# Altium PCB PCB1.PcbDoc
Units mm, origin at the board's own origin, x right, y up, seen from the top; angles counter-clockwise.
Board outline 26 x 60 mm, 4 copper layers (L1, L2, L3, L4), stack 0.603 mm thick; 27 components, 42 nets, 181 pads, 46 vias.
Unrouted connection lines stored in the file: 7.
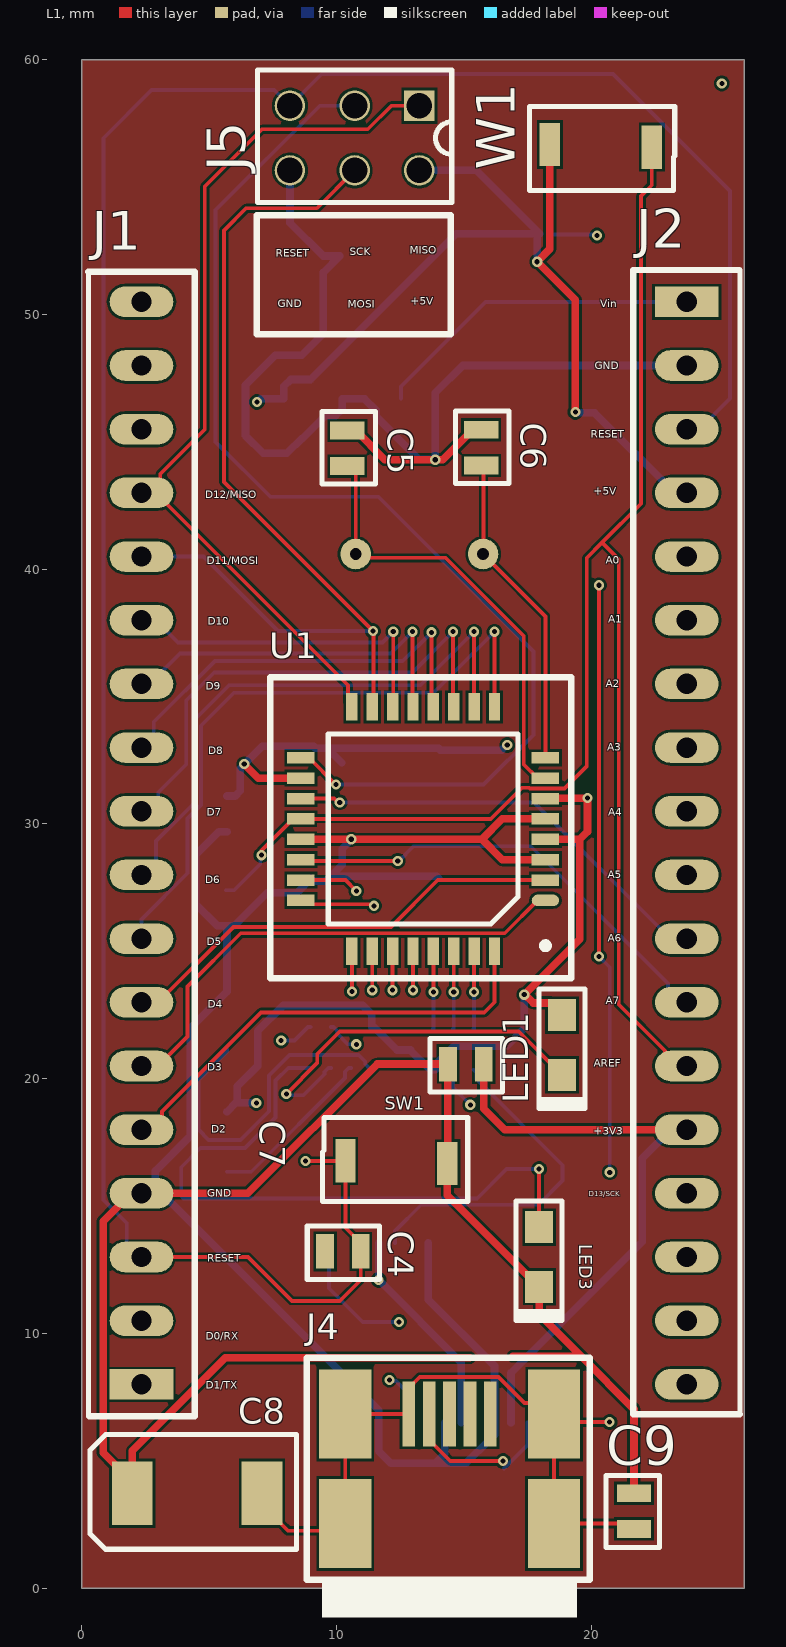
[diagram p0: L1 view]
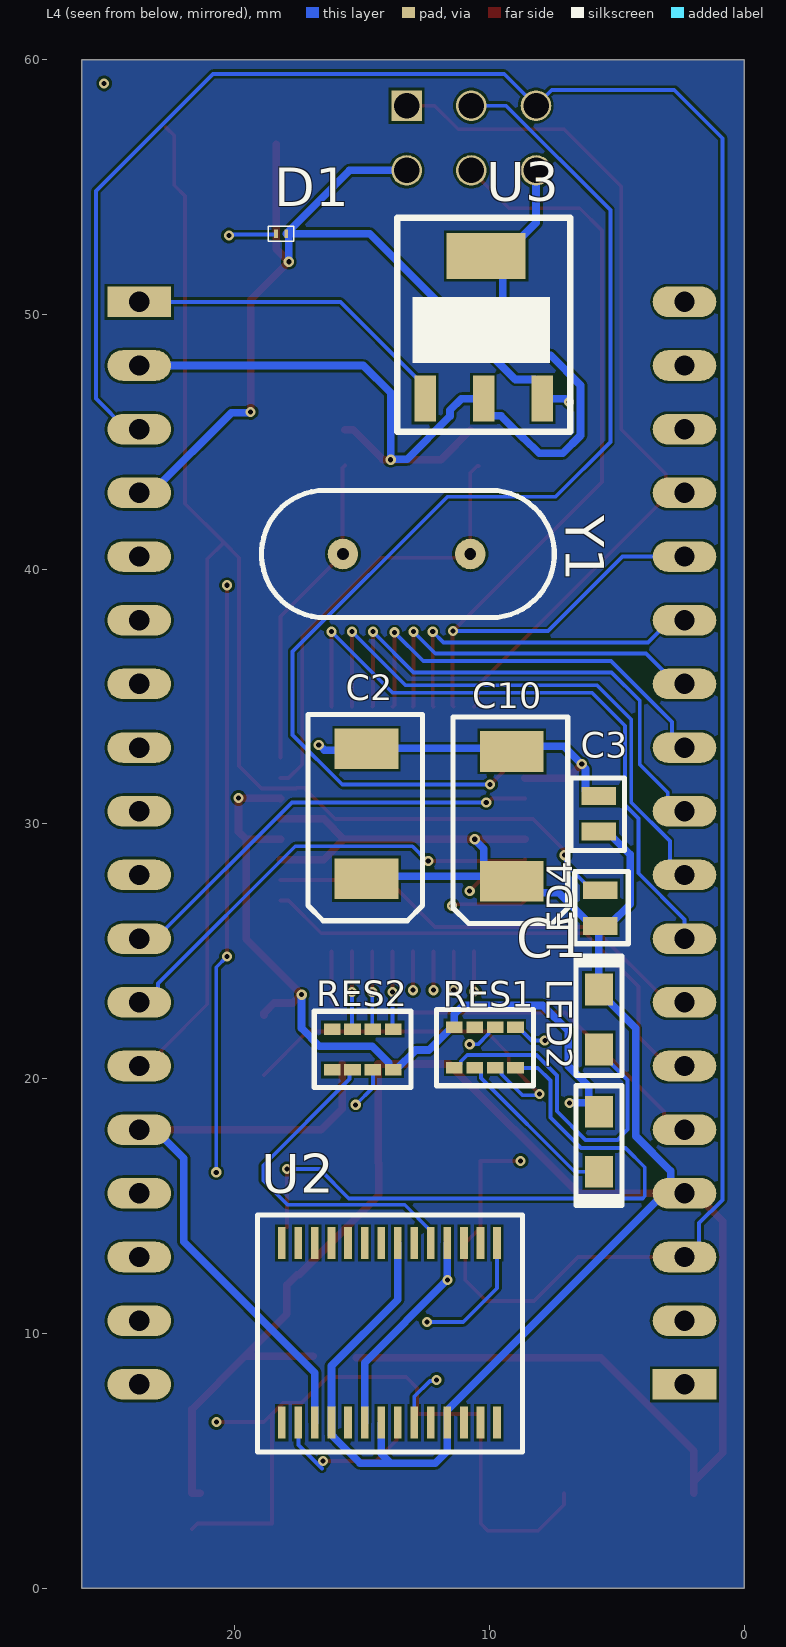
[diagram p1: L4 view, seen from below]
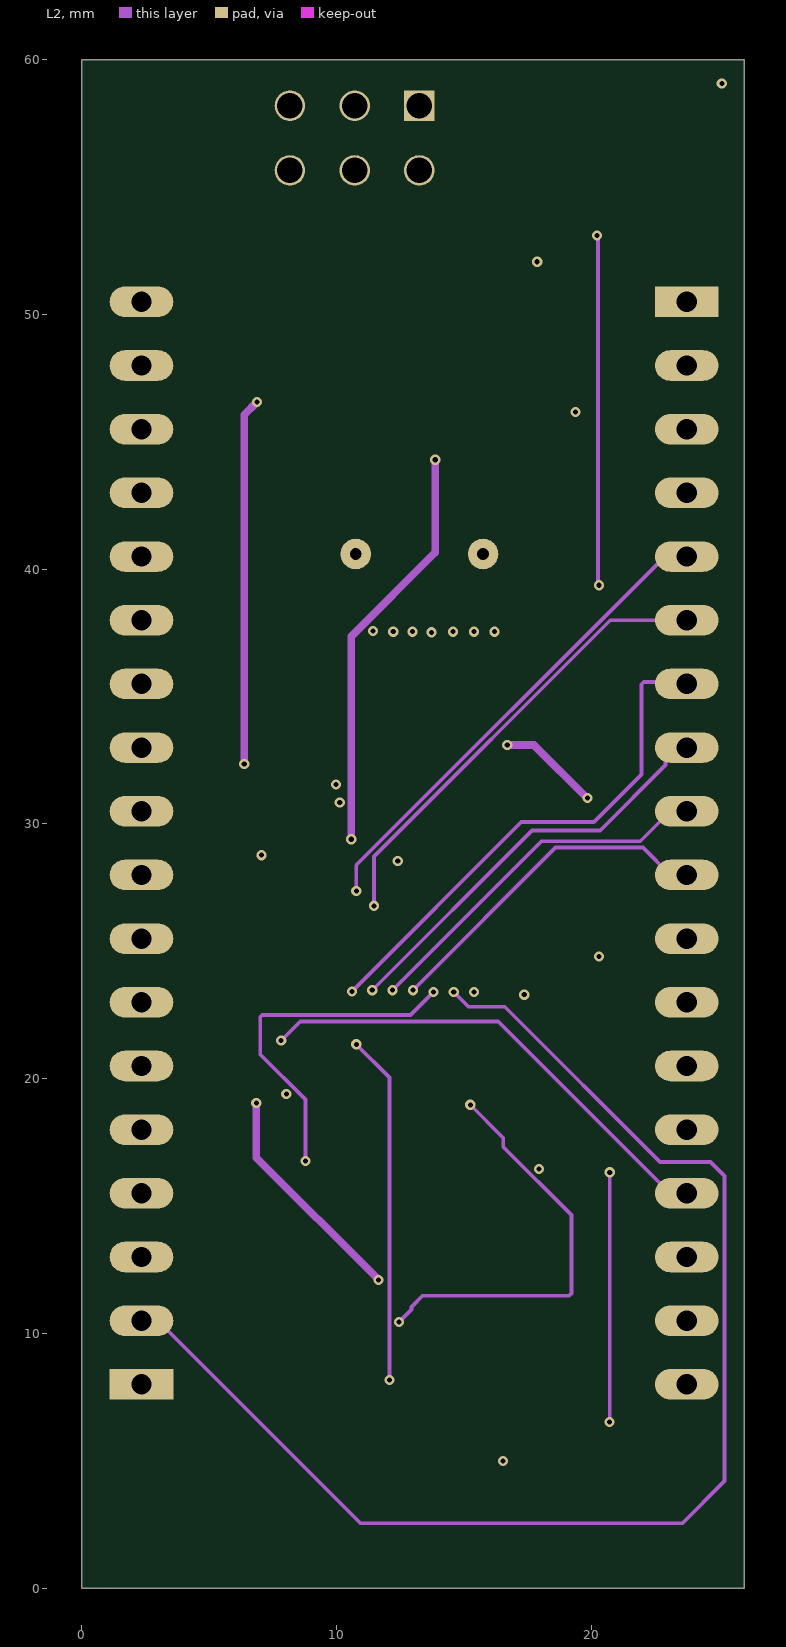
[diagram p2: L2]

## Layer stack, top to bottom
Top Solder: solder mask 0.0102, Solder Resist, Dk 3.5
L1: signal copper 0.035
Dielectric 2: prepreg 0.0711, PP-006, Dk 4.1
L2: signal copper 0.0356
Dielectric 1: dielectric 0.32, FR-4, Dk 4.8
L3: signal copper 0.0356
Dielectric 3: prepreg 0.0711, PP-006, Dk 4.1
L4: signal copper 0.035
Bottom Solder: solder mask 0.0102, Solder Resist, Dk 3.5

## Board outline
0,0 0,60 26,60 26,0

## Design rules (kind name [scope] priority, off if disabled: settings)
Clearance [All] p1: gap=0.1 ignorepadtopadclearanceinfootprint=FALSE
PolygonConnect [All] p1: connectstyle=Relief reliefconductorwidth=0.254 reliefentries=4 polygonreliefangle="90 Angle" airgapwidth=0.254
RoutingVias [All] p1: holewidth=0.2 width=0.4 viastyle="Through Hole" minholewidth=0.2 minwidth=0.4 maxholewidth=0.2 maxwidth=0.4
SolderMaskExpansion [All] p1: expansion=0.102 istentingtop=FALSE
Width "Schematic Width Constraint_2" [InNet('+3V3')] p1: maxlimit=0.3 minlimit=0.3 preferedwidth=0.3
Width "Schematic Width Constraint_1" [InNet('+5')] p2: maxlimit=0.3 minlimit=0.3 preferedwidth=0.3
Width "Schematic Width Constraint" [InNet('GND')] p3: maxlimit=0.3 minlimit=0.3 preferedwidth=0.3
Width [All] p4: maxlimit=0.5 minlimit=0.15 preferedwidth=0.15
30 further rules are at their usual default settings.

## Classes and differential pairs
component class Sheet2: D1 J1 J5 W1
component class Sheet1: C1 C2 C3 C4 C5 C6 C7 C8 C9 C10 LED1 LED2 LED4 RES1 RES2 SW1 U1 U2 Y1

## Components (designator, comment, footprint, x,y, rotation, side; value= is the part's Value field where it differs from the comment)
C1 "0.1uF" Capacitor0805 5.65,26.7 r270 bottom
C2 "4.7u" "tantalum cap 7343" 14.825,30.4 r270 bottom
C3 "0.1uF" Capacitor0805 5.7,30.4 r90 bottom
C4 "0.1uF" Capacitor0805 10.25,13.225 r180 top
C5 "18pF" Capacitor0805 10.425,44.75 r270 top
C6 "18pF" Capacitor0805 15.675,44.775 r270 top
C7 "0.1uF" Capacitor0805 15.075,20.575 r180 top
C8 "4.7uF" "tantalum cap 7343" 4.525,3.725 r180 top
C9 "4.7uF" Capacitor0805 21.675,3.025 r90 top
C10 "4.7uF" "tantalum cap 7343" 9.125,30.3 r270 bottom
D1 "MBR0520" "shotkey diode sod962" 18.175,53.175 r0 bottom
J1 "HEADER_18_NOS" DIP18 2.34,8 r180 top
J2 "HEADER_18_NOS" DIP18 23.75,50.5 r0 top
J4 "USB_B_MINI" "Mini B usb" 18.538,6.837 r90 top
J5 "HEADER_3X2_NOS" DIP6 13.25,58.2 r270 top
LED1 "RED_RX" "LED 0805" 18.85,21.325 r90 top
LED2 "GREEN_TX" "LED 0805" 5.7,17.525 r90 bottom
LED3 "L_AMBER" "LED 0805" 17.95,13 r90 top
LED4 "BLUE" "LED 0805" 5.7,22.325 r270 bottom
RES1 "Component_1" "Quad 4 res array" 8.975,22.125 r270 bottom
RES2 "Component_1" "Quad 4 res array" 13.775,22.05 r270 bottom
SW1 "RESET" switch 12.25,16.775 r0 top
U1 "atmega168 20au" Quad32 18.2,27 r180 top
U2 "FT232RL" "Quad28 FTDI" 9.7,13.55 r270 bottom
U3 "UA78M05" SOT223-4 10.225,46.7 r90 bottom
W1 "2XJP" switch 20.475,56.575 r180 top
Y1 "16MHz" "TH XT" 13.25,40.6 r180 bottom

## Footprints (in the part's own frame and the unit in brackets; to place one, negate y for a bottom-side part, rotate by r counter-clockwise, add the part's x,y. Pads: shape width x height; smd on the part's side, far side on the other; paste and mask are expansions set on the pad)
Capacitor0805 [mm]
  rect 0.7x1.35 on Mech16: 1(-0.7,0) 2(0.7,0)
  rect 0.7x1.35 smd: 1(-0.7,0) 2(0.7,0)
  silkscreen extent -1.44,-1 1.4,1.1, body extent -1.1,-0.7 1.1,0.75, height 0.89
DIP6 [mm]
  rect 1.2x1.2 hole 1: 1(0,0)
  round 1.2 hole 1: 2(0,-2.54) 3(0,-5.08) 4(2.54,-5.08) 5(2.54,-2.54) 6(2.54,0)
  silkscreen extent -1.4,-6.35 3.8,1.27, body extent -1.3,-6.31 3.78,1.31, height 8.39
DIP18 [mm]
  rect 2.5x1.2 hole 0.8: 1(0,0)
  oval 2.5x1.2 hole 0.8: 2(0,-2.5) 3(0,-5) 4(0,-7.5) 5(0,-10) 6(0,-12.5) 7(0,-15) 8(0,-17.5) 9(0,-20) 10(0,-22.5) 11(0,-25) 12(0,-27.5) 13(0,-30) 14(0,-32.5) 15(0,-35) 16(0,-37.5) 17(0,-40) 18(0,-42.5)
  silkscreen extent -2.1,-43.68 2.08,1.25
"LED 0805" [mm]
  rect 1.25x1.1 smd: 1(-1.175,0) 2(1.175,0)
  silkscreen extent -2.5,-0.9 2.2,0.9, body extent -1.03,-0.41 1.03,0.5, height 0.85
"Mini B usb" [mm]
  rect 3.5x2.05 smd: 1(-4.3,8.2) 1(-4.3,0) 1(0,8.2) 1(0,0)
  rect 2.55x0.5 smd: 1(0,5.7) 2(0,4.9) 3(0,4.1) 4(0,3.3) 5(0,2.5)
  silkscreen extent -8,-1.4 2.2,9.7, body extent -8,-0.85 1.2,9.05, height 3.86
"Quad28 FTDI" [mm]
  rect 1.25x0.3 smd: 1(0,0) 2(0,-0.65) 3(0,-1.3) 4(0,-1.95) 5(0,-2.6) 6(0,-3.25) 7(0,-3.9) 8(0,-4.55) 9(0,-5.2) 10(0,-5.85) 11(0,-6.5) 12(0,-7.15) 13(0,-7.8) 14(0,-8.45) 15(7.05,-8.45) 16(7.05,-7.8) 17(7.05,-7.15) 18(7.05,-6.5) 19(7.05,-5.85) 20(7.05,-5.2) 21(7.05,-4.55) 22(7.05,-3.9) 23(7.05,-3.25) 24(7.05,-2.6) 25(7.05,-1.95) 26(7.05,-1.3) 27(7.05,-0.65) 28(7.05,0)
  silkscreen extent -1.1,-9.4 8.2,1, body extent -0.3,-9.3 7.5,0.9, height 1.9
Quad32 [mm]
  oval 1.075x0.45 smd: 1(0,0)
  rect 1.075x0.45 smd: 2(0,-0.8) 3(0,-1.6) 4(0,-2.4) 5(0,-3.2) 6(0,-4) 7(0,-4.8) 8(0,-5.6) 17(9.6,-5.6) 18(9.6,-4.8) 19(9.6,-4) 20(9.6,-3.2) 21(9.6,-2.4) 22(9.6,-1.6) 23(9.6,-0.8) 24(9.6,0)
  rect 0.45x1.075 smd: 9(2,-7.6) 10(2.8,-7.6) 11(3.6,-7.6) 12(4.4,-7.6) 13(5.2,-7.6) 14(6,-7.6) 15(6.8,-7.6) 16(7.6,-7.6) 25(7.6,2) 26(6.8,2) 27(6,2) 28(5.2,2) 29(4.4,2) 30(3.6,2) 31(2.8,2) 32(2,2)
  silkscreen extent -1.02,-8.76 10.8,3.05, body extent 0.32,-7.3 9.33,1.71, height 1.15
"Quad 4 res array" [mm]
  rect 0.45x0.65 smd: 1(0.1,0) 2(0.1,-0.8) 3(0.1,-1.6) 4(0.1,-2.4) 5(1.7,-2.4) 6(1.7,-1.6) 7(1.7,-0.8) 8(1.7,0)
  silkscreen extent -0.6,-3.1 2.4,0.7, body extent 0.1,-2.8 1.7,0.4, height 0.51
"shotkey diode sod962" [mm]
  rect 0.15x0.32 smd: 1(-0.2,0) 2(0.2,0)
  silkscreen extent -0.5,-0.3 0.5,0.3, body extent -0.3,-0.15 0.3,0.15, height 0.33
SOT223-4 [mm]
  rect 1.8x0.84 smd: 1(0,2.3) 2(0,0) 3(0,-2.3)
  rect 1.8x3.1 smd: 4(5.6,-0.1)
  silkscreen extent -1.3,-3.4 7.1,3.4, body extent -0.7,-3.25 6.3,3.25, height 1.61
switch [mm]
  rect 0.8x1.7 smd: 1(-1.9,0) 2(2.1,-0.1)
  silkscreen extent -2.8,-1.6 2.9,1.7, body extent -2.4,-1.45 2.5,1.45, height 2.01
"tantalum cap 7343" [mm]
  rect 1.6x2.5 smd: 1(-2.55,0) 2(2.55,0)
  silkscreen extent -3.9,-2.3 4.2,2.2, body extent -3.57,-2.25 3.57,2.05, height 2.8
"TH XT" [mm]
  round 1.2 hole 0.457: 1(-2.5,0) 2(2.5,0)
  silkscreen extent -5.7,-2.5 5.8,2.5, body extent -5.75,-2.33 5.75,2.32, height 3.5

## Part data
C1 C2 C3 C4 C5 C6 C7 C8 C9 C10 D1 J1 J2 J4 J5 LED1 LED2 LED3 LED4 SW1 U2 U3 W1 Y1: library part Component_1

## Via types
v1: diameter 0.4, hole 0.2, L1 to L4, 46 vias

## Nets (pads, with @x,y where several pads share a name; then routed paths per layer and width w, separated by ;. In a path a pad name is that pad's centre, name@x,y a point inside that pad or via, vN(x,y) a via of type N, cw(c..) or ccw(c..) an arc to the next point about the centre after c; other vN are vias at no path point)
+3V3: C7.1@15.775,20.575 J2.14 U2.17 | length 24.8
  L1 w0.3: C7.1@15.775,20.575 15.775,18.825 16.6,18 J2.14
  L4 w0.3: U2.17 16.85,8.45 22,13.6 22,16.875 23.125,18 J2.14
+5: C2.1 C3.2@5.7,31.1 C10.1 D1.1 J2.4 J5.6 LED1.2 LED2.2 RES1.4 RES2.8 U1.4 U1.6 U1.18 U2.4 U2.20 U3.3 W1.2 | length 122
  L1 w0.3: v1(6.375,32.35) 6.925,31.8 U1.18 ; U1.4 19.55,29.4 ; U1.6 18.213,31.013 19.838,31.013 v1(19.85,31.025) ; W1.2 18.375,52.575 v1(17.875,52.075) 19.375,50.575 v1(19.375,46.175) ; LED1.2 18.85,22.575 18.45,22.975 17.722,22.975 17.397,23.3 v1(17.37,23.3) 19.55,25.48 19.55,29.4 ; v1@19.85,31 19.85,29.7 19.55,29.4
  L2 w0.3: v1(6.375,32.35) 6.375,46.068 v1(6.875,46.568) ; v1(6.85,19.05) 6.85,16.9 v1(11.65,12.1) ; v1(16.7,33.1) 17.75,33.1 19.825,31.025 v1(19.85,31.025)
  L4 w0.3: LED2.2 LED2.2@6.05,19.05 ; C3.2@5.7,31.1 6.025,31.1 6.225,31.3 6.225,32.173 6.375,32.323 v1(6.375,32.35) 7.075,33.05 9.1,33.05 9.175,32.975 C10.1@9.525,32.975 ; v1(6.85,19.05) LED2.2@6.05,19.05 ; v1(6.875,46.568) 6.902,46.568 7.034,46.7 U3.3 7.925,47.18 8.195,47.45 8.975,47.45 14.7,53.175 D1.1@17.91,53.175 ; C10.1@10.2,32.4 9.625,32.975 C10.1@9.525,32.975 ; U2.4 v1(11.65,12.1) 14.9,8.85 U2.20 ; J5.6 15.49,55.66 D1.1 D1.1@17.91,53.175 ; v1(16.7,33.1) 16.673,33.1 16.473,32.9 14.075,32.9 14,32.975 C10.1@9.525,32.975 ; v1(17.37,23.3) 17.375,23.295 17.375,21.975 16.675,21.275 14.596,21.275 13.95,20.629 13.95,20.425 13.875,20.35 RES2.8 13.675,20.35 12.9,21.125 12.375,21.125 11.475,22.025 RES1.4 11.375,22.524 11.024,22.875 7.9,22.875 6.9,21.875 6.9,20.5 6.1,19.7 6.1,19.1 LED2.2@6.05,19.05 ; v1(17.875,52.075) 17.875,53.075 17.9,53.1 17.9,53.165 D1.1@17.91,53.175 ; v1(19.375,46.175) 19.402,46.175 19.427,46.15 20.125,46.15 23.275,43 J2.4
A0: J2.5 U1.23 | length 22.2
  L1 w0.15: U1.23 10.35,27.8 v1(10.775,27.375)
  L2 w0.15: v1(10.775,27.375) 10.775,28.384 22.891,40.5 J2.5
  L4 w0.15: v1@10.775,27.307 v1(10.775,27.375) ; J2.5@23.175,40.015 23.66,40.5 J2.5
A1: J2.6 U1.24 | length 21.5
  L1 w0.15: U1.24 8.75,26.85 11.34,26.85 11.402,26.788 v1(11.47,26.788)
  L2 w0.15: v1(11.47,26.788) 11.47,28.725 20.745,38 J2.6
  L4 w0.15: J2.6@23.275,38 J2.6
A2: J2.7 U1.25 | length 21.9
  L1 w0.15: v1(10.6,23.425) 10.6,23.75 U1.25
  L2 w0.15: v1(10.6,23.425) 17.25,30.075 20.1,30.075 21.975,31.95 21.975,35.487 22.063,35.575 23.675,35.575 J2.7
A3: J2.8 U1.26 | length 17.9
  L1 w0.15: v1(11.4,23.475) U1.26
  L2 w0.15: v1(11.4,23.475) 17.675,29.75 20.35,29.75 22.917,32.317 22.917,32.515 23.402,33 J2.8
A4: J2.9 U1.27 | length 16
  L1 w0.15: v1(12.2,23.475) U1.27
  L2 w0.15: v1(12.2,23.475) 18.05,29.325 21.925,29.325 23.1,30.5 J2.9
A5: J2.10 U1.28 | length 15
  L1 w0.15: v1(13,23.475) U1.28
  L2 w0.15: v1(13,23.475) 18.6,29.075 22.025,29.075 23.1,28 J2.10
A6: J2.11 U1.19 | length 17.5
  L1 w0.15: U1.19 9.907,31 10.057,30.85 v1(10.125,30.85)
  L2 w0.15: v1(10.125,30.85) v1@10.173,30.898
  L4 w0.15: v1(10.125,30.85) 17.75,30.85 23.1,25.5 J2.11
A7: J2.12 U1.22 | length 18.1
  L1 w0.15: U1.22 8.65,28.55 v1(12.4,28.55)
  L4 w0.15: v1(12.4,28.55) 12.451,28.55 13.026,29.125 17.625,29.125 23.013,23.737 23.013,23.485 23.498,23 J2.12
AREF: C1.1@5.65,27.4 J2.13 U1.20 W1.1 | length 64.9
  L1 w0.15: v1(7.05,28.775) 7.05,28.963 8.287,30.2 U1.20 16.05,30.2 17.275,31.425 17.565,31.425 17.59,31.4 18.95,31.4 19.825,32.275 19.825,40.45 20.425,41.05 ; W1.1@22.7,57.35 22.375,57.025 W1.1 22.375,55.075 21.95,54.65 21.95,42.575 20.425,41.05 ; J2.13 23.384,20.5 22.899,20.985 22.899,21.099 21.075,22.923 21.075,40.4 20.425,41.05
  L4 w0.15: C1.1@5.65,27.4 5.975,27.4 7.002,28.427 7.002,28.727 v1(7.05,28.775)
CBUS0: RES1.2 U2.23 | length 17.2
  L2 w0.15: v1(10.775,21.35) 12.075,20.05 v1(12.075,8.175)
  L4 w0.15: RES1.2 9.875,22.025 10.025,21.875 10.025,21.778 10.453,21.35 v1(10.775,21.35) ; v1(12.075,8.175) 12.113,8.137 12.338,8.137 12.95,7.525 U2.23
CBUS1: RES1.3 U2.22
D0/RX: J1.2 RES2.2 U1.30 | length 55.5
  L1 w0.15: v1(14.6,23.4) U1.30
  L2 w0.15: J1.2 2.99,10.5 10.94,2.55 23.575,2.55 25.225,4.2 25.225,16.175 24.675,16.725 22.7,16.725 16.6,22.825 15.175,22.825 v1(14.6,23.4)
  L4 w0.15: RES2.2 14.6,21.975 v1(14.6,23.4)
D1/TX: J1.1 RES2.3 U1.31 | length 3.1
  L1 w0.15: v1(15.4,23.4) U1.31
  L4 w0.15: RES2.3 15.4,21.975 v1(15.4,23.4)
D2: J1.5 U1.32 | length 18.1
  L1 w0.15: J1.5 2.658,18 3.143,18.485 3.143,18.713 7.03,22.6 15.8,22.6 16.2,23 U1.32
D3: J1.6 U1.1 | length 19.7
  L1 w0.15: J1.6 2.99,20.5 4.15,21.66 4.15,23.625 6.238,25.713 16.6,25.713 17.888,27 U1.1
D4: J1.7 U1.2 | length 17.8
  L1 w0.15: J1.7 2.99,23 5.952,25.963 12.138,25.963 13.975,27.8 U1.2
D5: J1.8 U1.9 | length 25.3
  L1 w0.15: U1.9 v1(16.2,37.55)
  L4 w0.15: J1.8 2.34,26.254 4.15,28.064 4.15,30.21 4.681,30.742 4.681,33.856 5.975,35.15 13.8,35.15 v1(16.2,37.55)
D6: J1.9 U1.10 | length 22.4
  L1 w0.15: U1.10 v1(15.4,37.55)
  L4 w0.15: J1.9 2.43,28 2.915,28.485 2.915,29.329 4.431,30.846 4.431,34.106 5.775,35.45 13.3,35.45 v1(15.4,37.55)
D7: J1.10 U1.11 | length 19.6
  L1 w0.15: v1(14.575,37.55) 14.575,34.625 U1.11
  L4 w0.15: J1.10@2.502,30.5 2.511,30.5 2.996,30.985 2.996,31.237 4.099,32.34 4.099,34.849 5.2,35.95 12.975,35.95 v1(14.575,37.55)
D8: J1.11 U1.12 | length 16.5
  L1 w0.15: v1(13.725,37.525) 13.725,34.675 U1.12
  L4 w0.15: J1.11 2.825,33.485 2.825,34 5.225,36.4 12.6,36.4 v1(13.725,37.525)
D9: J1.12 U1.13 | length 14.6
  L1 w0.15: v1(12.975,37.55) 12.975,34.625 U1.13
  L4 w0.15: J1.12@2.25,35.5 2.25,35.498 2.269,35.48 2.63,35.48 3.85,36.7 12.125,36.7 v1(12.975,37.55)
D10: J1.13 U1.14 | length 13.5
  L1 w0.15: U1.14 12.225,34.625 v1(12.225,37.55)
  L4 w0.15: J1.13@2.25,38 2.9,38 3.775,37.125 11.8,37.125 v1(12.225,37.55)
D11/MOSI: J1.14 J5.5 U1.15 | length 37.7
  L1 w0.15: J5.5 9.225,54.175 6.45,54.175 5.575,53.3 5.575,43.425 v1(11.425,37.575) 11.448,37.552 11.448,34.648 U1.15
  L4 w0.15: J1.14@2.25,40.5 4.775,40.5 7.7,37.575 v1(11.425,37.575)
D12/MISO: J1.15 J5.1 U1.16 | length 35.6
  L1 w0.15: J1.15 J1.15@2.592,43 ; U1.16 10.45,34.75 10.45,35.45 2.9,43 J1.15@2.592,43 ; J5.1@12.725,57.675 J5.1 12.15,58.2 11.225,57.275 7.075,57.275 4.825,55.025 4.825,45.485 3.077,43.737 3.077,43.485 J1.15@2.592,43
D13/SCK: J2.15 J5.2 RES1.1 U1.17 | length 66.3
  L1 w0.15: U1.17 8.912,32.6 9.963,31.55 v1(9.975,31.55)
  L2 w0.15: v1(7.825,21.5) 8.575,22.25 16.35,22.25 23.1,15.5 J2.15
  L4 w0.15: v1(7.825,21.5) 8.35,21.5 8.875,22.025 RES1.1 ; v1(9.975,31.55) 15.775,31.55 17.725,33.5 17.725,36.775 11.65,42.85 7.4,42.85 5.25,45 5.25,54.1 9.35,58.2 J5.2 ; J2.15 J2.15@23.85,15.4
GND: C1.2@5.65,26 C2.2 C3.1@5.7,29.7 C5.1@10.425,45.45 C6.1@15.675,45.475 C7.2@14.375,20.575 C8.2 C9.2@21.675,3.725 C10.2 J1.4 J2.2 J4.5 J5.4 LED3.1 LED4.1 SW1.2 U1.3 U1.5 U1.21 U2.7 U2.18 U2.21 U2.25 U3.2 U3.4 | length 195.5
  L1 w0.3: C8.2 C8.2@1.975,4.175 ; U1.21 v1(10.575,29.4) 15.71,29.4 ; C5.1@10.75,45.45 11.9,44.3 v1(13.875,44.3) 14.175,44.3 15.35,45.475 C6.1@15.675,45.475 ; 15.225,9.05 5.625,9.05 1.975,5.4 C8.2@1.975,4.175 ; 16.925,9.1 19.6,9.1 ; U1.3 16.51,28.6 15.71,29.4 ; U1.5 16.51,30.2 15.71,29.4 ; C9.2@21.35,3.725 21.675,3.725 21.675,7.025 19.6,9.1 ; C8.2@1.975,4.175 0.84,5.31 0.84,14.406 1.369,14.936 1.934,15.5 J1.4 6.515,15.5 11.59,20.575 14.375,20.575 14.362,20.563 14.362,16.687 SW1.2 14.35,15.425 17.475,12.3 17.55,12.3 17.95,11.9 LED3.1 17.95,10.75 19.6,9.1
  L2 w0.3: v1(10.575,29.4) 10.575,37.361 13.875,40.661 v1(13.875,44.3)
  L4 w0.3: J1.4 3.129,15.5 11.65,6.979 U2.25 11.65,5.375 12.125,4.9 13.875,4.9 ; J1.4@2.554,15.596 2.874,15.916 2.874,16.374 4.25,17.75 4.25,21.975 5.7,23.425 LED4.1 5.7,25.95 C1.2@5.65,26 ; C3.1@5.7,29.7 5.375,29.7 4.475,28.8 4.475,26.85 5.325,26 C1.2@5.65,26 ; J5.4 8.17,53.605 9.475,52.3 U3.4 9.475,51.65 9.475,49.248 8.627,48.4 7.6,48.4 6.423,47.223 6.423,45.252 7.125,44.55 8.05,44.55 8.65,45.15 8.675,45.15 9.547,46.022 9.955,46.022 10.225,46.292 U3.2 11.095,46.7 11.548,46.247 11.548,46.003 13.232,44.319 13.856,44.319 v1(13.875,44.3) 13.875,46.925 14.95,48 J2.2 ; C10.2@9.012,27.862 8.45,27.3 7.275,27.3 5.975,26 C1.2@5.65,26 ; C10.2 9.575,27.75 C10.2@9.775,27.95 ; v1(10.575,29.4) 10.575,29.373 10.225,29.023 10.225,28.4 C10.2@9.775,27.95 ; U2.7 13.6,11.325 16.2,8.725 U2.18 16.2,6.025 15.988,5.813 15.988,5.809 15.079,4.9 13.875,4.9 ; C2.2@14,27.875 13.925,27.95 C10.2@9.775,27.95 ; U2.21 14.25,5.275 13.875,4.9
L_AMBER_RES: LED3.2 RES1.8 | length 25.5
  L1 w0.15: LED3.2 v1(17.95,16.45)
  L4 w0.15: RES1.8 8.1,20.425 7.6,19.925 7.6,18.475 6.4,17.275 4.65,17.275 3.9,16.525 3.9,15.388 3.988,15.3 15.525,15.3 16.675,16.45 v1(17.95,16.45)
NetC4_2: C4.2@9.55,13.225 U2.2
NetC5_2: C5.2@10.425,44.05 U1.7 Y1.2 | length 17.7
  L1 w0.15: C5.2@10.425,44.05 10.475,44.05 10.75,43.775 Y1.2 10.9,40.45 14.275,40.45 17.35,37.375 17.35,32.338 17.888,31.8 U1.7
NetC6_2: C6.2@15.675,44.075 U1.8 Y1.1 | length 12.5
  L1 w0.15: C6.2@15.675,44.075 15.763,43.987 15.763,40.613 Y1.1 18.2,38.15 U1.8
NetJ4_2: J4.2 U2.16 | length 6.4
  L1 w0.15: J4.2 13.638,5.812 14.462,4.988 v1(16.538,4.988)
  L4 w0.15: 16.575,4.7 17.5,5.625 U2.16
NetJ4_3: J4.3 U2.15
NetLED1_1: LED1.1 RES1.7 | length 15
  L1 w0.15: v1(8.028,19.401) 9.238,20.611 9.238,20.963 10.125,21.85 17.15,21.85 LED1.1
  L4 w0.15: v1(8.028,19.401) 8.076,19.353 8.443,19.353 8.446,19.35 8.697,19.35 9.525,20.178 9.525,20.275 9.675,20.425 RES1.7
NetLED2_1: LED2.1 RES1.6 | length 6.7
  L4 w0.15: LED2.1 6.65,16.35 10.325,20.025 10.325,20.275 10.475,20.425 RES1.6
NetLED4_2: LED4.2 RES1.5 | length 13
  L4 w0.15: LED4.2 5.7,21.075 4.575,19.95 4.575,18 4.975,17.6 6.225,17.6 7.35,18.725 7.35,20.125 8.15,20.925 10.872,20.925 11.125,20.672 11.125,20.575 11.275,20.425 RES1.5
RESET: C4.1@10.95,13.225 J1.3 J2.3 J5.3 RES2.1 SW1.1 U1.29 | length 115.8
  L1 w0.15: J1.3 6.525,13 8.25,11.275 10.125,11.275 10.95,12.1 10.95,13.225 10.95,13.55 10.35,14.15 SW1.1 v1(8.775,16.775) ; v1(13.8,23.4) U1.29
  L2 w0.15: v1(8.775,16.775) 8.775,19.184 7,20.959 7,22.412 7.088,22.5 12.9,22.5 v1(13.8,23.4)
  L4 w0.15: J1.3 2.25,13 1.765,13.485 1.765,14.329 0.85,15.244 0.85,56.925 2.74,58.815 7.555,58.815 J5.3 9.42,59.45 20.85,59.45 25.45,54.85 25.45,46.7 24.25,45.5 J2.3 ; RES2.1 13.8,21.975 v1(13.8,23.4)
RX: RES2.7 U2.1 | length 23.1
  L2 w0.15: v1(12.45,10.45) 12.94,10.94 12.94,11.04 13.382,11.482 19.137,11.482 19.225,11.57 19.225,14.645 16.546,17.323 16.546,17.679 v1(15.25,18.975)
  L4 w0.15: U2.1 9.7,11.775 11.025,10.45 v1(12.45,10.45) ; RES2.7 14.575,19.65 v1(15.25,18.975)
TX: RES2.6 U2.5 | length 13.7
  L4 w0.15: U2.5 12.3,14.025 13.325,15.05 17.925,15.05 18.875,16 18.875,16.6 15.487,19.988 15.487,20.238 RES2.6
VIN: J2.1 U3.1 | length 13.1
  L4 w0.15: U3.1 12.525,47.18 15.845,50.5 J2.1
VUSB: C8.1 C9.1@21.675,2.325 D1.2 J4.1 | length 77.1
  L1 w0.15: C8.1 7.075,3.275 8.1,2.25 10.05,2.25 10.338,2.538 10.338,6.837 12.838,6.837 12.838,7.863 13.263,8.288 16.36,8.288 17.375,7.272 18.103,7.272 J4.1@18.538,6.837 ; v1(20.3,24.8) v1(20.3,39.375) ; v1(20.719,6.519) 18.856,6.519 J4.1@18.538,6.837 ; C9.1@21.675,2.325 21.463,2.538 18.538,2.538 J4.1@18.538,6.837
  L2 w0.15: v1(20.225,53.1) 20.262,53.062 20.262,39.413 v1(20.3,39.375) ; v1(20.719,6.519) 20.722,6.522 20.722,16.322 v1(20.725,16.325)
  L4 w0.15: D1.2 18.375,53.137 20.188,53.137 v1(20.225,53.1) ; v1(20.3,24.8) 20.725,24.375 v1(20.725,16.325)
pads on no net: C1.1@5.65,27.4 C1.2@5.65,26 C3.1@5.7,29.7 C3.2@5.7,31.1 C4.1@10.95,13.225 C4.2@9.55,13.225 C5.1@10.425,45.45 C5.2@10.425,44.05 C6.1@15.675,45.475 C6.2@15.675,44.075 C7.1@15.775,20.575 C7.2@14.375,20.575 C9.1@21.675,2.325 C9.2@21.675,3.725 J1.16 J1.17 J1.18 J2.16 J2.17 J2.18 J4.4 RES2.4 RES2.5 U2.3 U2.6 U2.8 U2.9 U2.10 U2.11 U2.12 U2.13 U2.14 U2.19 U2.24 U2.26 U2.27 U2.28
copper on no net:
  other v1: 25.125,59.075

## Polygon pours and split planes (outlines as drawn)
no net on L1 "NONET_L01_P000" (solid, pour order 0): 0,60 26,60 26,0 0,0
no net on L4 "NONET_L04_P001" (solid, pour order 1): 0,60 26,60 26,0 0,0

## Silkscreen, mask and mechanical layers (free items; w line width, h text height)
Top Overlay:
  lines w0.254: 6.875,49.225 6.875,53.9 14.475,53.9 14.475,49.225 6.875,49.225
  text "MISO" at 12.87,52.395 h0.3
  text "SCK" at 10.52,52.32 h0.3
  text "RESET" at 7.62,52.27 h0.3
  text "+5V" at 12.92,50.395 h0.3
  text "GND" at 7.695,50.295 h0.3
  text "Vin" at 20.345,50.295 h0.3
  text "MOSI" at 10.445,50.27 h0.3
  text "GND" at 20.145,47.845 h0.3
  text "RESET" at 19.97,45.17 h0.3
  text "+5V" at 20.095,42.92 h0.3
  text "D12/MISO" at 4.845,42.795 h0.3
  text "A0" at 20.57,40.22 h0.3
  text "D11/MOSI" at 4.895,40.195 h0.3
  text "A1" at 20.67,37.895 h0.3
  text "D10" at 4.945,37.82 h0.3
  text "A2" at 20.57,35.37 h0.3
  text "D9" at 4.87,35.27 h0.3
  text "A3" at 20.62,32.87 h0.3
  text "D8" at 4.97,32.745 h0.3
  text "D7" at 4.895,30.32 h0.3
  text "A4" at 20.67,30.32 h0.3
  text "A5" at 20.645,27.87 h0.3
  text "D6" at 4.845,27.67 h0.3
  text "A6" at 20.645,25.37 h0.3
  text "D5" at 4.895,25.245 h0.3
  text "A7" at 20.57,22.92 h0.3
  text "D4" at 4.945,22.795 h0.3
  text "AREF" at 20.095,20.47 h0.3
  text "D3" at 4.92,20.32 h0.3
  text "D2" at 5.07,17.87 h0.3
  text "+3V3" at 20.095,17.795 h0.3
  text "D13/SCK" at 19.895,15.395 h0.2
  text "GND" at 4.92,15.37 h0.3
  text "RESET" at 4.92,12.82 h0.3
  text "D0/RX" at 4.87,9.745 h0.3
  text "D1/TX" at 4.87,7.82 h0.3

## Text inside footprints (layer, text, board x,y; h text height)
C1: Mechanical 29 "Designator" at 5.317,26.6 h0.7 r90
C3: Mechanical 29 "Designator" at 6.033,30.5 h0.7 r270
C4: Mechanical 29 "Designator" at 10.15,12.892 h0.7 r180
C5: Mechanical 29 "Designator" at 10.758,44.65 h0.7 r270
C6: Mechanical 29 "Designator" at 16.008,44.675 h0.7 r270
C7: Mechanical 29 "Designator" at 14.975,20.242 h0.7 r180
C9: Mechanical 29 "Designator" at 21.342,3.125 h0.7 r90